# EAGLE board 3x4 - FR1 - Single Sided (EAGLE 8.7.1)

Size 101.6 x 76.2 mm. Coordinates in mm from the lower left corner, seen from the top.
Copper layers (1*16): Top 0.035mm / dielectric 1.5mm / Bottom 0.035mm
Design rules "default": minimum track width 10mil, minimum drill 24mil, track to track 8mil, track to pad 8mil, pad to pad 8mil, via to via 8mil, smd to smd 8mil, copper to edge 40mil, drill to drill 8mil, minimum pad ring 10mil, minimum via ring 8mil, stop-mask expansion 4mil, vias tented up to drill 0mil, thermal gap 10mil

## Footprints (pad centres in the part's own frame; a part is rotated, then mirrored left to right if it is on the bottom)
3X4_BOARD_FR1_RAW = hole 0.5: 3.5,3.5; 98.1,72.7

## Placement (x,y rotation side)
E$1  [3X4_BOARD_FR1_RAW]  0,0 0 top

## Library data of the parts
E$1 = voltera_EAGLE_community_lib